# Altium PCB IK-1.PCBDOC (part 2 of 2)
Units mil, origin at the board's own origin, x right, y up, seen from the top; angles counter-clockwise.
Board outline 1760 x 825 mil, 4 copper layers (Top, GND Plane, Mid1-Ver, Bottom), stack 61.6 mil thick; 31 components, 39 nets, 162 pads, 191 vias.
Unrouted connection lines stored in the file: 1.
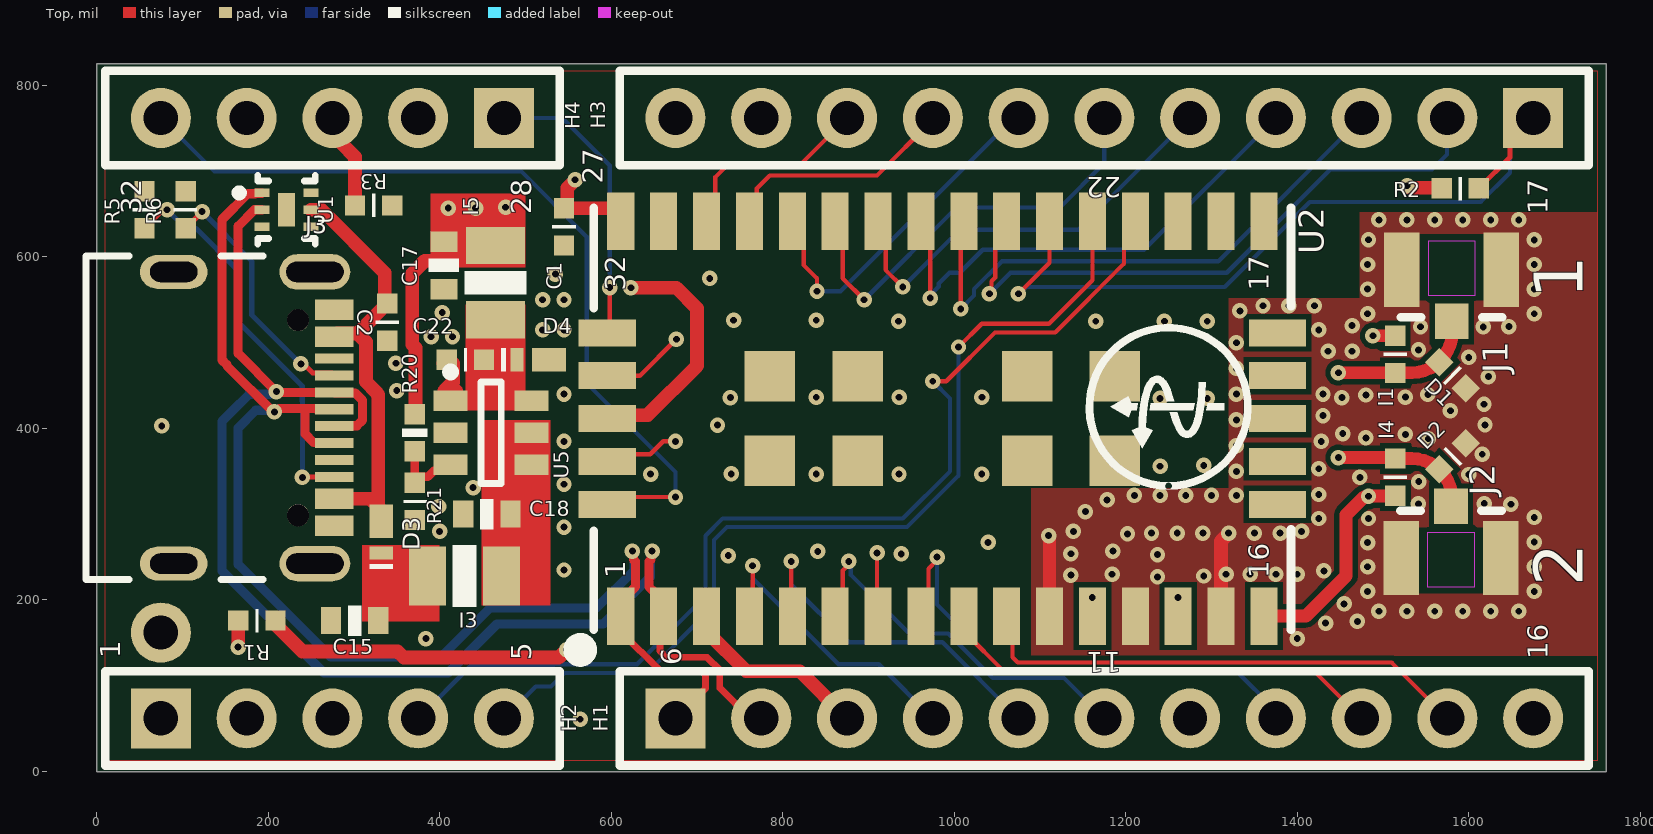
[diagram p0: Top view]

## Via types
v1: diameter 18, hole 8, Top to Bottom, 191 vias

## Nets (pads, with @x,y where several pads share a name; then routed paths per layer and width w, separated by ;. In a path a pad name is that pad's centre, name@x,y a point inside that pad or via, vN(x,y) a via of type N, cw(c..) or ccw(c..) an arc to the next point about the centre after c; other vN are vias at no path point) (continued)
copper on no net: | length 12.7
  Top w16: 75,162 87.68,162

## Polygon pours and split planes (outlines as drawn)
GND on Top "NONET_L01_P017" (solid, remove dead copper, shelved, pour order 17): 1750,816.97 1750,12.28 10,12.28 10,817
GND on Top "RF_GND_L-01_P-001" (solid, pour order 12): 1090,330 1320,330 1320,552 1473,552 1473,652 1750,652 1750,135 1090,135
+3.3V on Mid1-Ver "NONET_L03_P016" (solid, remove dead copper, shelved, pour order 16): 1751.8,817 1751.8,12.28 9.91,12.28 9.91,817
GND on Mid1-Ver "RF_GND_L-03_P-001" (solid, pour order 9): 1090,330 1320,330 1320,552 1473,552 1473,652 1750,652 1750,135 1090,135
GND on Bottom "NONET_L04_P019" (solid, remove dead copper, shelved, pour order 19): 1750,816.97 1750,12.28 10,12.28 10,817
GND on GND Plane (split plane): 1749.91,657.55 1471,657.55 1470.03,657.36 1469.2,656.8 1468.65,655.98 1468.45,655 1468.45,557.55 1318,557.55 1317.03,557.36 1316.2,556.8 1315.65,555.98 1315.45,555 1315.45,335.55 1087,335.55 1086.03,335.36 1085.2,334.8 1084.65,333.98 1084.45,333 1084.45,133 1084.65,132.03 1085.2,131.2 1086.03,130.65 1087,130.45 1749.91,130.45 1749.91,10.09 10.09,10.09 10.09,814.91 1749.91,814.91
GND on GND Plane (split plane): 1749.91,135.55 1089.55,135.55 1089.55,330.45 1318,330.45 1318.98,330.65 1319.8,331.2 1320.36,332.03 1320.55,333 1320.55,552.45 1471,552.45 1471.98,552.65 1472.8,553.2 1473.36,554.03 1473.55,555 1473.55,652.45 1749.91,652.45

## Other copper
Top:
  region net VIN: 400,175 400,264 309.69,264 309.69,175
  region net VIN_P: 529,193.55 529,410 449,410 449,193.55
  region net +3.3V: 500,587.65 500,674 389.25,674 389.25,587.65
  region net SW: 500,421.14 500,544.35 430,544.35 430,421.14
  pour cut-out: 1090,265 1085,265 1085,335 1090,335
  pour cut-out: 1760,135 1085,135 1085,130 1760,130
  pour cut-out: 1473,652 1475,652 1760,652.13 1760,657 1473,657
  pour cut-out: 1473,552 1468,552 1468,657 1473,657
  pour cut-out: 1320,552 1468,552 1468,557 1320,557
  pour cut-out: 1320,330 1320,557 1315,557 1315,330
  pour cut-out: 1090,330 1090,335 1315,335 1315,330
  pour cut-out: 1090,135 1090,250 1085,250 1085,135
  pour cut-out: 353.28,391 388.85,391 388.85,398.87 359.46,398.87 388.85,398.87 353.28,398.87
  pour cut-out: 425.56,444.16 429.71,448.31 429.71,462.28 434.61,462.28 439,457.89 439,445
  pour cut-out: 813.12,46.21 836.88,46.21 836.88,77.79 813.12,77.79
  pour cut-out: 1513.12,46.21 1536.88,46.21 1536.88,77.79 1513.12,77.79
  pour cut-out: 556.06,483.15 622.68,483.15 625.46,485.92 625.46,489.84 556.06,489.84
  pour cut-out: 556.06,433.15 634.8,433.15 634.8,439.84 556.06,439.84
  pour cut-out: 682.83,220.55 689.53,220.55 689.53,161.86 686.75,159.09 682.83,159.09
  pour cut-out: 732.83,220.55 732.83,161.86 736.75,161.86 739.53,159.09 739.53,220.55
  pour cut-out: 1032.83,220.55 1039.53,220.55 1039.53,151.16 1035.61,151.16 1032.83,153.93
  pour cut-out: 1182.83,602.44 1189.53,628.56 1189.53,681.18 1182.83,681.18
  pour cut-out: 913.12,776 913.12,746.21 936.88,746.21 936.88,776
  pour cut-out: 732.83,602.44 739.53,602.44 739.53,681.18 732.83,681.18
  pour cut-out: 52.05,320.36 52.05,489.65 13,489.65 13,320.36
Mid1-Ver:
  pour cut-out: 742.27,36.88 710.15,36.88 710,37.03 715.91,42.94 715.91,81.51 726.04,81.51 735.1,72.45
  pour cut-out: 407.73,36.88 442.27,36.88 442.27,87.12 407.73,87.12
  pour cut-out: 307.73,36.88 342.27,36.88 342.27,87.12 307.73,87.12
  pour cut-out: 213.12,777.79 236.88,777.79 236.88,746.21 223.94,759.15 215.91,759.15
  pour cut-out: 313.12,777.79 336.88,777.79 336.88,746.21 313.12,746.21
  pour cut-out: 413.12,777.79 413.64,777.27 440,777.27 440,746.01 439.8,746.21 413.12,746.21
Bottom:
  pour cut-out: 1760,130 1760,135 1085,135 1085,130
  pour cut-out: 1473,652 1473,657 1760,657 1760,652
  pour cut-out: 1473,552 1468,552 1468,657 1473,657
  pour cut-out: 1320.03,557 1320.03,552 1468.5,552 1468.5,557
  pour cut-out: 1320,330 1315,330 1315,557 1320,557
  pour cut-out: 1090,335 1090,330 1315,330 1315,335
  pour cut-out: 1090,135 1085,135 1085,335 1090,335
  pour cut-out: 1213.12,777.79 1236.88,777.79 1236.88,746.21 1213.12,746.21
  pour cut-out: 984.64,543.56 991.42,543.56 992.65,542.33 994.92,544.6 994.92,547.81 988.13,547.81 986.91,549.04
  pour cut-out: 1413.12,777.79 1436.88,777.79 1436.88,746.21
  pour cut-out: 1436.88,777.79 1436.88,746.21 1436.88,777.79
  pour cut-out: 1513.12,777.79 1536.88,777.79 1536.88,746.21 1513.12,746.21
  pour cut-out: 1607.73,787.12 1607.88,787.26 1640,787.26 1640,752.55 1638.78,753.77 1609.02,753.77
  pour cut-out: 413.12,46.21 436.88,46.21 436.88,77.79 413.12,77.79
GND Plane (plane layer: these items are gaps in the copper):
  lines w5: 1750,133 1087,133 1087,333 1318,333 1318,555 1471,555 1471,655 1750,655

## Silkscreen, mask and mechanical layers (free items; w line width, h text height)
Silkscreen Top:
  region: 1249.93,328.65 ccw(c1249.93,425.26) 1249.79,328.65 ccw(c1249.8,332.88) 1249.8,328.65 ccw(c1249.8,332.88) 1249.81,337.1 cw(c1249.93,425.26) 1249.93,337.1 ccw(c1249.93,332.88)
  region: 1295.36,429.41 1314.96,429.41 1314.96,421 1294.06,421
  region: 1181.84,425.06 1203.03,437.59 1206.65,429.36 1214,429.36 1212.99,421.02 1206.63,421.02 1203.21,412.99
  region: 1219.32,376.73 1206.8,397.92 1215.02,401.54 1215.02,402.53 1223.36,401.52 1231.4,398.1
  region: 1215.04,402.47 1215.33,411.15 1216.35,422.42 1217.09,427.9 1218.89,437.25 1220.2,442.37 1222.43,448.84 1224.58,453.03 1225.99,455.24 1227.21,456.79 1228.81,458.46 1230.41,459.54 1231.85,460.44 1233.27,460.96 1234.7,461.3 1236.07,461.43 1237.67,461.43 1238.8,461.25 1240.62,460.65 1242.2,459.95 1243.67,458.87 1245.58,457.08 1247,455.37 1248.4,453.36 1250.04,450.25 1251.64,446.79 1253.18,442.79 1254.49,438.85 1255.64,435.17 1256.63,431.55 1247.86,431.55 1246.3,437.05 1244.5,442.25 1242.67,446.54 1240.89,449.87 1239.83,451.18 1238.44,452.44 1237.53,452.89 1236.63,453.07 1235.66,453.07 1234.67,452.56 1233.64,451.63 1232.66,450.41 1231.81,449.08 1230.91,447.32 1230.03,445.27 1229.42,443.52 1228.74,441.6 1228.07,439.08 1227.26,436.19 1226.38,432.07 1225.61,427.74 1225,423.55 1224.35,417.79 1223.65,410.7 1223.15,401.55
  region: 1229.22,429.41 1280.16,429.41 1278.88,421 1227.93,421
  region: 1293.32,453.97 1292.97,441.62 1292.08,430.86 1290.96,422.53 1289.16,413.18 1287.85,408.06 1285.62,401.59 1283.47,397.4 1282.07,395.19 1280.84,393.65 1279.24,391.97 1277.64,390.9 1276.21,390 1274.79,389.48 1273.35,389.13 1271.98,389.01 1270.38,389.01 1269.25,389.19 1267.43,389.78 1265.85,390.48 1264.38,391.56 1262.47,393.36 1261.05,395.07 1259.65,397.08 1258.02,400.19 1256.42,403.64 1254.87,407.65 1253.56,411.58 1252.41,415.27 1251.42,418.88 1260.19,418.88 1261.75,413.38 1263.55,408.19 1265.39,403.89 1267.16,400.57 1268.22,399.25 1269.61,398 1270.53,397.55 1271.42,397.37 1272.39,397.37 1273.38,397.87 1274.41,398.8 1275.4,400.03 1276.24,401.36 1277.14,403.12 1278.02,405.17 1278.63,406.91 1279.32,408.83 1279.98,411.35 1280.79,414.24 1281.67,418.36 1282.44,422.69 1283.05,426.88 1283.7,432.65 1284.4,439.73 1285.07,453.97
  text "1" at 1752.36,550.95 h98.43 r90
  text "2" at 1752.35,215.95 h98.43 r90
Silkscreen Bottom:
  text "G4" at 1091.36,709.28 h60 r90
  text "G19" at 91.08,704.01 h60 r90
  text "G18" at 191.08,704.01 h60 r90
  text "VAUX" at 291.08,704.01 h60 r90
  text "G17" at 391.08,704.01 h60 r90
  text "G16" at 491.08,704.01 h60 r90
  text "+3.3V" at 691.08,704.01 h60 r90
  text "GND" at 791.08,704.01 h60 r90
  text "PPS1" at 891.11,704.01 h60 r90
  text "G3" at 991.08,704.01 h60 r90
  text "G10" at 1191.63,704.28 h60 r90
  text "G11" at 1291.91,704.28 h60 r90
  text "G12" at 1392.18,704.28 h60 r90
  text "G13" at 1492.46,704.28 h60 r90
  text "G10" at 1592.73,704.28 h60 r90
  text "RST" at 1692.73,704.28 h60 r90
  text "IK-1.0.0" at 1617.4,555.06 h65 r90
  text "VUSB" at 132.69,350.61 h60 r90
  text "VBAT" at 895.14,268.05 h60 r90
  text "PPS2" at 495.14,255.9 h60 r90
  text "GND" at 195.14,241.05 h60 r90
  text "GND" at 295.14,241.05 h60 r90
  text "GND" at 1695.14,241.05 h60 r90
  text "G20" at 395.14,225 h60 r90
  text "D_N" at 789.29,222.75 h60 r90
  text "D_P" at 689.29,219.9 h60 r90
  text "G7" at 1294,195.7 h60 r90
  text "G2" at 1094.76,194.65 h60 r90
  text "G8" at 1393.62,194.7 h60 r90
  text "G5" at 1493.25,194.75 h60 r90
  text "G9" at 1592.87,195.4 h60 r90
  text "G6" at 1194.38,194.3 h60 r90
  text "G1" at 995.14,187.4 h60 r90
Dimensions:
  drawing of 331 lines, arcs and shapes, not listed
  text "Layer" at 2237.02,770.56 h60
  text "Name" at 2646.93,770.56 h60
  text "Material" at 3816.6,770.56 h60
  text "Thickness" at 4676.37,770.56 h60
  text "Constant" at 5326.2,770.56 h60
  text "Board Layer Stack" at 5896.06,770.56 h60
  text "Silkscreen Top" at 2646.93,650.56 h60
  text "Solder Mask Top" at 2646.93,530.56 h60
  text "Solder Resist" at 3816.6,530.56 h60
  text "0.40mil" at 4676.37,530.56 h60
  text "3.5" at 5326.2,530.56 h60
  text "1" at 2237.02,410.56 h60
  text "Top" at 2646.93,410.56 h60
  text "2.10mil" at 4676.37,410.56 h60
  text "Dielectric1" at 2646.93,290.56 h60
  text "PP-006" at 3816.6,290.56 h60
  text "8.00mil" at 4676.37,290.56 h60
  text "4.1" at 5326.2,290.56 h60
  text "2" at 2237.02,170.56 h60
  text "GND Plane" at 2646.93,170.56 h60
  text "0.70mil" at 4676.37,170.56 h60
  text "Dielectric3" at 2646.93,50.56 h60
  text "Core-009" at 3816.6,50.56 h60
  text "40.00mil" at 4676.37,50.56 h60
  text "4.5" at 5326.2,50.56 h60
  text "3" at 2237.02,-69.44 h60
  text "Mid1-Ver" at 2646.93,-69.44 h60
  text "0.70mil" at 4676.37,-69.44 h60
  text "Dielectric2" at 2646.93,-189.44 h60
  text "PP-006" at 3816.6,-189.44 h60
  text "8.00mil" at 4676.37,-189.44 h60
  text "4.1" at 5326.2,-189.44 h60
  text "4" at 2237.02,-309.44 h60
  text "Bottom" at 2646.93,-309.44 h60
  text "2.10mil" at 4676.37,-309.44 h60
  text "Solder Mask Bottom" at 2646.93,-429.44 h60
  text "Solder Resist" at 3816.6,-429.44 h60
  text "0.40mil" at 4676.37,-429.44 h60
  text "3.5" at 5326.2,-429.44 h60
  text "Silkscreen Bottom" at 2646.93,-549.44 h60
Drill Drawing:
  lines w5: -152.32,-1375.1 2097.08,-1375.1 ; -152.32,-937.6 2097.08,-937.6 ; 166.35,-1462.6 166.35,-850.1 ; 570.75,-1462.6 570.75,-850.1 ; 1353.01,-1462.6 1353.01,-850.1 ; 1645.44,-1462.6 1645.44,-850.1 ; -152.32,-1462.6 2097.08,-1462.6 2097.08,-850.1 -152.32,-850.1 -152.32,-1462.6 ; -117.7,-1348.85 -78.82,-1348.85 -78.82,-1309.96 -117.7,-1309.96 -117.7,-1348.85 ; -117.7,-1251.63 -107.98,-1251.63 -98.26,-1261.35 -88.54,-1251.63 -78.82,-1251.63 -88.54,-1241.91 -78.82,-1232.19 -88.54,-1232.19 -98.26,-1222.46 -107.98,-1232.19 -117.7,-1232.19 -107.98,-1241.91 -117.7,-1251.63 ; -117.7,-1173.85 -98.26,-1164.13 -78.82,-1173.85 -88.54,-1154.41 -78.82,-1134.96 -98.26,-1144.69 -117.7,-1134.96 -107.98,-1154.41 -117.7,-1173.85 ; -117.7,-1076.63 -107.98,-1076.63 -107.98,-1086.35 -88.54,-1086.35 -88.54,-1076.63 -78.82,-1076.63 -78.82,-1057.19 -88.54,-1057.19 -88.54,-1047.46 -107.98,-1047.46 -107.98,-1057.19 -117.7,-1057.19 -117.7,-1076.63 ; -117.7,-998.85 -117.7,-989.13 -107.98,-979.41 -117.7,-969.69 -117.7,-959.96 -107.98,-959.96 -98.26,-969.69 -88.54,-959.96 -78.82,-959.96 -78.82,-969.69 -88.54,-979.41 -78.82,-989.13 -78.82,-998.85 -88.54,-998.85 -98.26,-989.13 -107.98,-998.85 -117.7,-998.85
  text "Symbol" at -99.82,-911.35 h42
  text "Hit Count" at 192.6,-911.35 h42
  text "Finished Hole Size" at 597,-911.35 h42
  text "Plated" at 1379.26,-911.35 h42
  text "Hole Type" at 1671.69,-911.35 h42
  text "2" at 192.6,-998.85 h35
  text "23.62mil (0.600mm)" at 597,-998.85 h35
  text "PTH" at 1379.26,-998.85 h35
  text "Slot" at 1671.69,-998.85 h35
  text "2" at 192.6,-1086.35 h35
  text "23.62mil (0.600mm)" at 597,-1086.35 h35
  text "PTH" at 1379.26,-1086.35 h35
  text "Slot" at 1671.69,-1086.35 h35
  text "2" at 192.6,-1173.85 h35
  text "25.59mil (0.650mm)" at 597,-1173.85 h35
  text "NPTH" at 1379.26,-1173.85 h35
  text "Round" at 1671.69,-1173.85 h35
  text "33" at 192.6,-1261.35 h35
  text "40.00mil (1.016mm)" at 597,-1261.35 h35
  text "PTH" at 1379.26,-1261.35 h35
  text "Round" at 1671.69,-1261.35 h35
  text "191" at 192.6,-1348.85 h35
  text "8.00mil (0.203mm)" at 597,-1348.85 h35
  text "PTH" at 1379.26,-1348.85 h35
  text "Round" at 1671.69,-1348.85 h35
  text "230 Total" at 192.6,-1436.35 h35
  text "Slot definitions :" at -99.82,-1519.26 h35
  text "Routed Path Length" at 500.25,-1519.26 h35
  text "= Calculated from tool start centre position to tool end centre position." at 1141.14,-1519.26 h35
  text "Hole Length" at 500.25,-1575.91 h35
  text "= Routed Path Length + Tool Size = Slot length as defined in the PCB layout" at 902.05,-1575.91 h35
Board Outline:
  the board outline again, w5

## Dimensions
1675,62 to 1675,762 on Dimensions
475,762 to 675,762 on Dimensions
75,762 to 175,762 on Dimensions
1760,0 to 1760,825 on Dimensions
0,0 to 1760,0 on Dimensions

## Text inside footprints (layer, text, board x,y; h text height)
H1: Silkscreen Top "6" at 690,124 h40 r90; Silkscreen Top "11" at 1195,147 h40 r180; Silkscreen Top "16" at 1700,131 h40 r90; Silkscreen Bottom "11" at 1230,165 h40 r90; Silkscreen Bottom "16" at 1735,166 h40 r90; Silkscreen Bottom "6" at 635,145 h40 r90
H2: Silkscreen Top "1" at 36,132 h40 r90; Silkscreen Top "5" at 515,130 h40 r90; Silkscreen Bottom "1" at 37,128 h40 r90; Silkscreen Bottom "5" at 538,143 h40 r90
H3: Silkscreen Top "22" at 1195,701 h40 r180; Silkscreen Top "17" at 1700,650 h40 r90; Silkscreen Top "27" at 598.34,685.5 h40 r90; Silkscreen Bottom "22" at 1230,694 h40 r90; Silkscreen Bottom "17" at 1735,696 h40 r90; Silkscreen Bottom "27" at 635,691 h40 r90
H4: Silkscreen Top "32" at 60,650 h40 r90; Silkscreen Top "28" at 515,650 h40 r90; Silkscreen Bottom "32" at 40,695 h40 r90; Silkscreen Bottom "28" at 530,689 h40 r90
J3: Layer_15 "PCB EDGE" at -8.43,199.9 h20 r270
U2: Silkscreen Top "1" at 624.69,225.43 h40 r90; Silkscreen Top "16" at 1374.69,225.43 h40 r90; Silkscreen Top "17" at 1374.69,560.43 h40 r90; Silkscreen Top "32" at 624.69,560.43 h40 r90